# Altium PCB Test32U2.PcbDoc
Units mil, origin at the board's own origin, x right, y up, seen from the top; angles counter-clockwise.
Board outline 1500 x 2050 mil, 2 copper layers (Top Layer, Bottom Layer); 26 components, 36 nets, 125 pads, 19 vias.
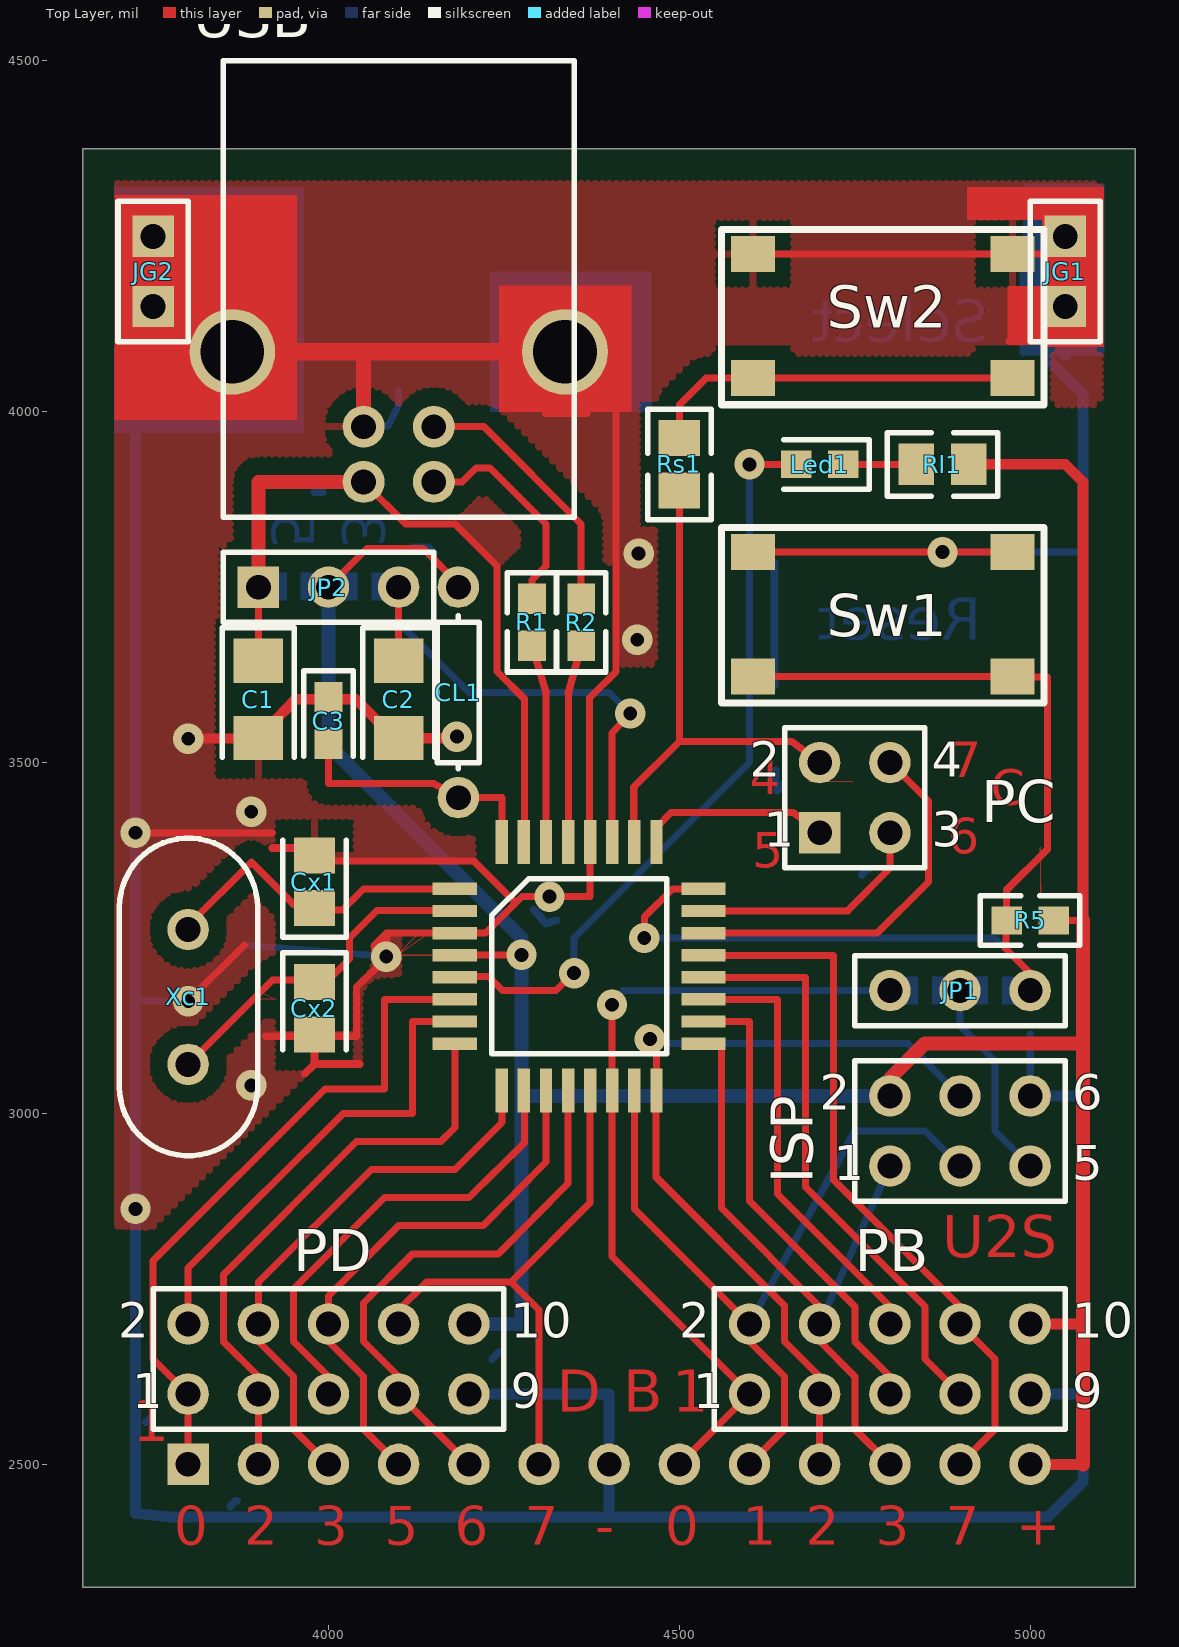
[diagram p0: Top Layer view]
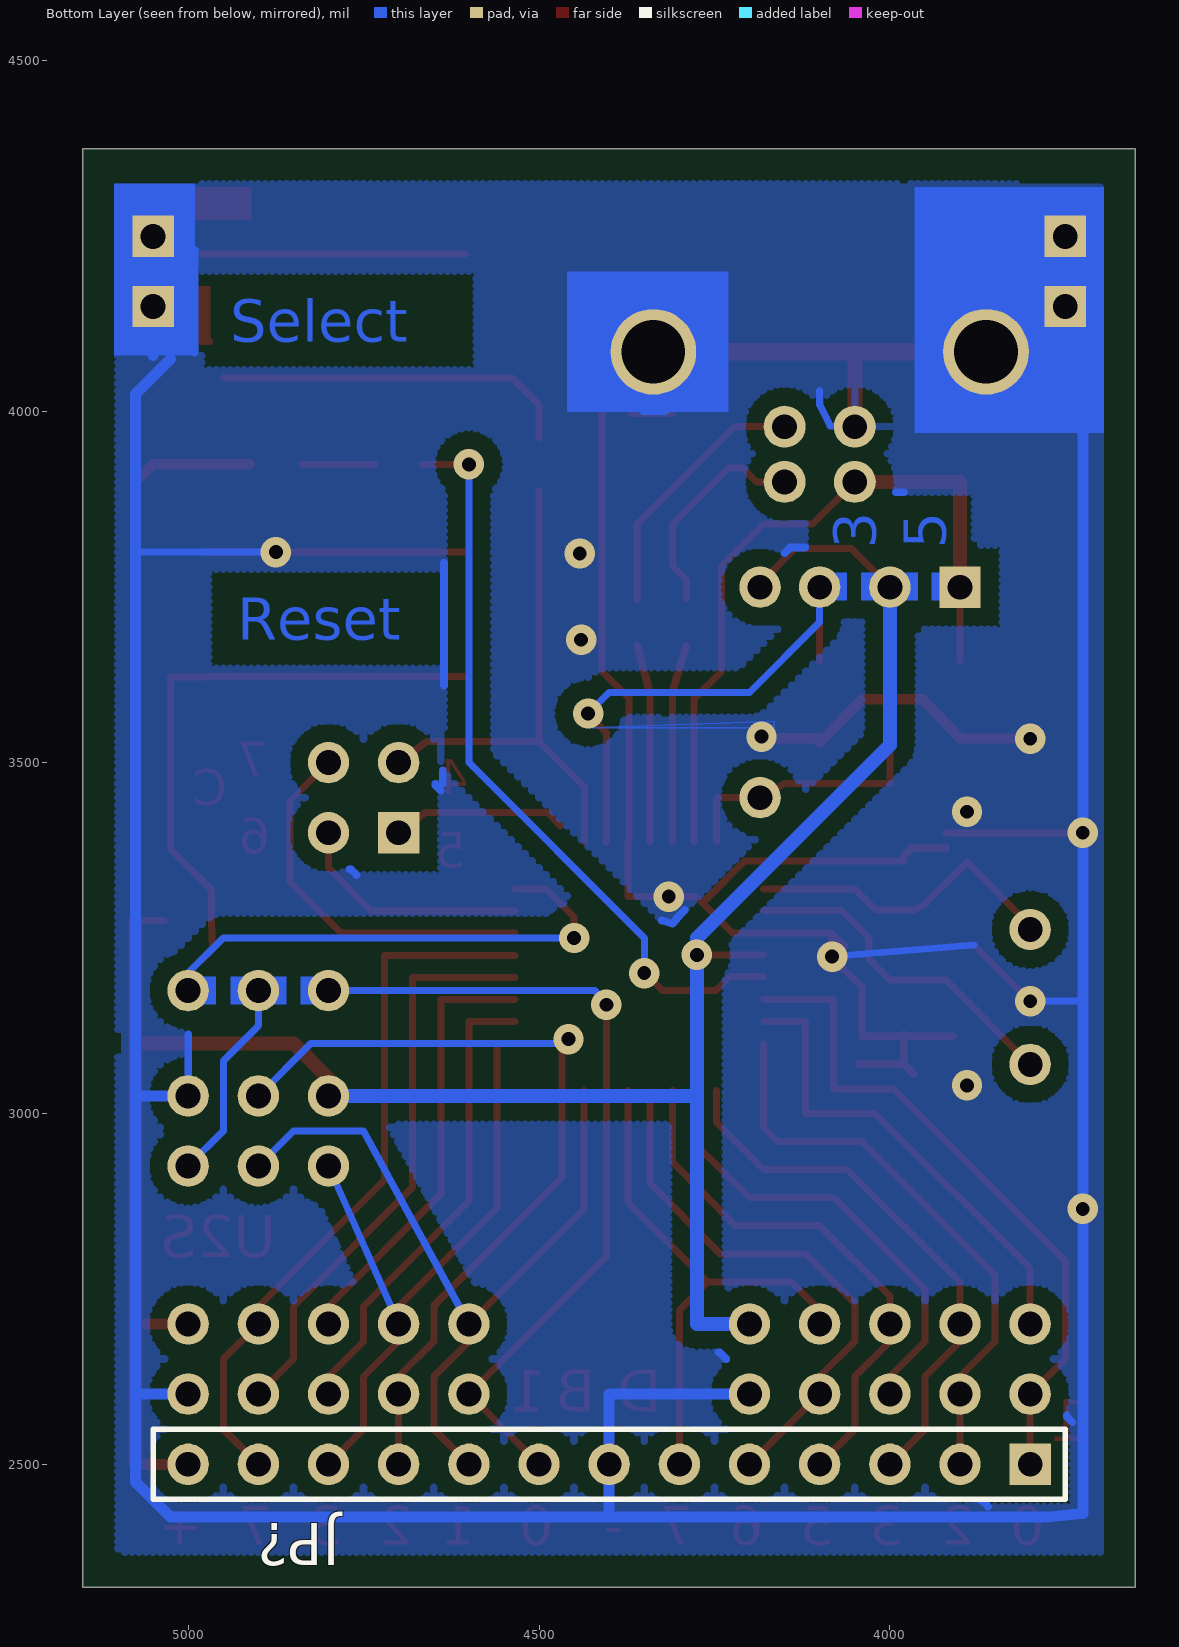
[diagram p1: Bottom Layer view, seen from below]

## Layer stack, top to bottom
Top Layer: signal copper 1.4
Dielectric: dielectric 12.6, FR-4, Dk 4.8
Bottom Layer: signal copper 1.4

## Board outline
5150,4375 5150,2895 5150,2325 3650,2325 3650,2800 3650,4375

## Design rules (kind name [scope] priority, off if disabled: settings)
Clearance [All] p1: gap=10
ComponentClearance [All] p1: gap=10 collisioncheckmode=0
PolygonConnect [All] p1: connectstyle=Relief reliefconductorwidth=10 reliefentries=4 polygonreliefangle="90 Angle"
RoutingLayers [All] p1: top layer=Horizontal bottom layer=Vertical
RoutingVias [All] p1: holewidth=28 width=50 viastyle="Through Hole" minholewidth=28 minwidth=50 maxholewidth=28 maxwidth=50
SolderMaskExpansion [All] p1: expansion=4
TestPointUsage [All] p1: valid=0 allowmultiple=FALSE
Testpoint [All] p1: side=15 testpointundercomponent=TRUE minsize=40 maxsize=100 preferedsize=60 minholesize=0 maxholesize=40 preferedholesize=32 testpointgrid=1 style=1023 order=1234567890
Width [All] p1: maxlimit=100 minlimit=10 preferedwidth=10 toplayer_prefwidth=11 bottomlayer_prefwidth=11 minimp=50.000000 maximp=50.000000 favimp=50.000000
16 further rules are at their usual default settings.

## Classes and differential pairs
component class Test162: PB U1

## Components (designator, comment, footprint, x,y, rotation, side; value= is the part's Value field where it differs from the comment)
C1 "" CC3216-1206 3900,3590 r270 top
C2 "" CC3216-1206 4100,3590 r270 top
C3 "" CC1608-0603 4000,3560 r270 top
CL1 "Res1" AXIAL-0.3 4185,3600 r90 top
Cx1 "Cap Pol3" CC2012-0805 3980,3330 r90 top
Cx2 "Cap Pol3" CC2012-0805 3980,3150 r270 top
ISP "Header 3X2" HDR2X3 4800,2925 r0 top
JG1 "Header 2" HDR1X2 5050,4250 r270 top
JG2 "Header 2" HDR1X2 3750,4250 r270 top
JP1 "Header 3" HDR1X3#1 4800,3175 r0 top
JP2 "Header 3" HDR1X3#2 3900,3750 r0 top
JP? "Header 13" HDR1X13 3800,2500 r0 bottom
Led1 "" CC1608-0603 4700,3925 r180 top
PB "Header 5X2" HDR2X5 4600,2600 r0 top
PC "Header 2X2" HDR2X2 4700,3400 r0 top
PD "Header 5X2" HDR2X5 3800,2600 r0 top
R1 "Res3" C1608-0603 4290,3700 r270 top
R2 "Res3" C1608-0603 4360,3700 r270 top
R5 "" C1608-0603 5000,3275 r0 top
Rl1 "Res Semi" CR2012-0805 4875,3925 r0 top
Rs1 "Res Semi" CR2012-0805 4500,3925 r90 top
Sw1 "Component_1" MTS-1132 4975,3800 r180 top
Sw2 "Component_1" MTS-1132 4975,4225 r180 top
USB "Component_1" USBB 4050,3900 r0 top
Xc1 "Component_1" HC49 3800,3070 r90 top
? "Mega32U2" ATMega32U2 4180,3320 r0 top

## Footprints (in the part's own frame and the unit in brackets; to place one, negate y for a bottom-side part, rotate by r counter-clockwise, add the part's x,y. Pads: shape width x height; smd on the part's side, far side on the other; paste and mask are expansions set on the pad)
ATMega32U2 [mm]
  rect 1.6x0.45 smd: 1(0,0) 2(0,-0.8) 3(0,-1.6) 4(0,-2.4) 5(0,-3.2) 6(0,-4) 7(0,-4.8) 8(0,-5.6) 17(9,-5.6) 18(9,-4.8) 19(9,-4) 20(9,-3.2) 21(9,-2.4) 22(9,-1.6) 23(9,-0.8) 24(9,0)
  rect 0.45x1.6 smd: 9(1.7,-7.3) 10(2.5,-7.3) 11(3.3,-7.3) 12(4.1,-7.3) 13(4.9,-7.3) 14(5.7,-7.3) 15(6.5,-7.3) 16(7.3,-7.3) 25(7.3,1.7) 26(6.5,1.7) 27(5.7,1.7) 28(4.9,1.7) 29(4.1,1.7) 30(3.3,1.7) 31(2.5,1.7) 32(1.7,1.7)
  silkscreen extent 1.34,-5.96 7.67,0.36
AXIAL-0.3 [mm]
  round 1.5 hole 0.9: 1(-3.81,0) 2(3.81,0)
  silkscreen extent -2.77,-0.76 2.77,0.76
C1608-0603 [mm]
  rect 1.1x1 smd: 1(-0.85,0) 2(0.85,0)
  silkscreen extent -1.8,-0.9 1.8,0.9
CC1608-0603 [mm]
  rect 1.1x1 smd: 1(-0.85,0) 2(0.85,0)
  silkscreen extent -1.8,-0.9 1.3,0.9
CC2012-0805 [mm]
  rect 1.3x1.5 smd: 1(-0.95,0) 2(0.95,0)
  silkscreen extent -2,-1.15 1.5,1.15
CC3216-1206 [mm]
  rect 1.6x1.8 smd: 1(-1.4,0) 2(1.4,0)
  silkscreen extent -2.6,-1.3 2.1,1.3
CR2012-0805 [mm]
  rect 1.3x1.5 smd: 1(-0.95,0) 2(0.95,0)
  silkscreen extent -2,-1.15 2,1.15
HC49 [mm]
  round 1.5 hole 0.9: 1(0,0) 2(4.88,0)
  silkscreen extent -3.31,-2.51 8.19,2.49
HDR1X2 [mm] "Connector; Header; 2 Position"
  rect 1.5x1.5 hole 0.9: 1(0,0) 2(2.54,0)
  silkscreen extent -1.27,-1.27 3.81,1.27
HDR1X3#1 [mm] "Connector; Header; 3 Position"
  round 1.5 hole 0.9: 1(0,0) 2(2.54,0) 3(5.08,0)
  silkscreen extent -1.27,-1.27 6.35,1.27
HDR1X3#2 [mm] "Connector; Header; 3 Position"
  rect 1.5x1.5 hole 0.9: 1(0,0)
  round 1.5 hole 0.9: 2(2.54,0) 3(5.08,0)
  silkscreen extent -1.27,-1.27 6.35,1.27
HDR1X13 [mm] "Connector; Header; 13 Position"
  rect 1.5x1.5 hole 0.9: 1(0,0)
  round 1.5 hole 0.9: 2(2.54,0) 3(5.08,0) 4(7.62,0) 5(10.16,0) 6(12.7,0) 7(15.24,0) 8(17.78,0) 9(20.32,0) 10(22.86,0) 11(25.4,0) 12(27.94,0) 13(30.48,0)
  silkscreen extent -1.27,-1.27 31.75,1.27
HDR2X2 [mm] "Connector; Header; 2x2 Position"
  rect 1.5x1.5 hole 0.9: 1(0,0)
  round 1.5 hole 0.9: 2(0,2.54) 3(2.54,0) 4(2.54,2.54)
  silkscreen extent -1.27,-1.27 3.81,3.81
HDR2X3 [mm] "Connector; Header; 3x2 Position"
  round 1.5 hole 0.9: 1(0,0) 2(0,2.54) 3(2.54,0) 4(2.54,2.54) 5(5.08,0) 6(5.08,2.54)
  silkscreen extent -1.27,-1.27 6.35,3.81
HDR2X5 [mm] "Connector; Header; 5x2 Position"
  round 1.5 hole 0.9: 1(0,0) 2(0,2.54) 3(2.54,0) 4(2.54,2.54) 5(5.08,0) 6(5.08,2.54) 7(7.62,0) 8(7.62,2.54) 9(10.16,0) 10(10.16,2.54)
  silkscreen extent -1.27,-1.27 11.43,3.81
MTS-1132 [mm]
  rect 1.6x1.3 smd: 1(0,0) 1(9.4,0) 2(0,4.5) 2(9.4,4.5)
  silkscreen extent -1.14,-0.89 10.54,5.46
USBB [mm]
  round 1.52 hole 0.9: 1(0,0) 2(2.54,0) 3(2.54,2) 4(0,2)
  round 3.1 hole 2.3: 5(-4.75,4.71) 5(7.29,4.71)
  silkscreen extent -5.08,-1.27 7.62,15.24

## Part data
C1 C2 C3 Cx1 Cx2: library part "Cap Semi", "Capacitor (Semiconductor SIM Model)"
CL1 R1 R2: "Resistor"
ISP: "Header, 3-Pin, Dual row"
JG1 JG2: "Header, 2-Pin"
JP1 JP2: "Header, 3-Pin"
JP?: library part "Header 12", "Header, 12-Pin"
Led1: library part LED3, "Typical BLUE SiC LED"
PB PD: "Header, 5-Pin, Dual row"
PC: library part "Header 5X2", "Header, 5-Pin, Dual row"
R5: library part Res3, "Resistor"
Rl1 Rs1: "Semiconductor Resistor"
?: library part Component_1

## Via types
v1: diameter 43.31, hole 19.68, Top Layer to Bottom Layer, tented both sides, 19 vias

## Nets (pads, with @x,y where several pads share a name; then routed paths per layer and width w, separated by ;. In a path a pad name is that pad's centre, name@x,y a point inside that pad or via, vN(x,y) a via of type N, cw(c..) or ccw(c..) an arc to the next point about the centre after c; other vN are vias at no path point)
AVCC: ?.32 C3.2 CL1.1 | length 371.3
  Top Layer w10: C3.2 4000,3470 4150,3470 4190,3450 4247,3450 ?.32
D+: ?.29 R2.2 | length 282
  Top Layer w10: ?.29@4342,3386.93 4342,3600
  Top Layer w11: 4342,3600 R2.2
D-: ?.30 R1.2 | length 282.5
  Top Layer w10: ?.30@4310,3386.93 4310,3600
  Top Layer w11: R1.2 4310,3600
GND: ?.3 ?.28 C1.2 C2.2 C3.1 Cx1.2 Cx2.2 ISP.6 JG1.1 JG1.2 JG2.1 JG2.2 JP?.7 PB.9 PD.9 Sw1.1 Sw2.1 USB.4 USB.5 | length 10874.3
  Top Layer w10: v1(3725,3400) 3770,3400 3920,3400 ; v1(3800,3160) 3880,3240 ; 3910,3110 4040,3110 4040,3180 4070,3209 v1(4082.3,3223.5) 4083,3257 ; Cx1.2@3980,3360 4207,3360 4266,3301 ; v1@4065.5,3235.3 4065,3239 4083,3257 ; v1@4180.88,3534.88 v1(4183,3537) ; ?.28@4372,3386.93 4372,3592 4410,3630 4410,4010 ; 4372.91,3309 ?.28 ; 4373,3309 4276,3309 4224,3257 ?.3 4129,3257 4083,3257 ; Sw1.1@4604.92,3800 Sw1.1@4975,3800 ; Sw2.1@4604.92,4225 5054,4225 JG1.1 ; 4969.97,4099.99 5025.97,4099.99
  Top Layer w11: 3919.97,3378.23 3969.17,3378.23 Cx1.2 ; 3966.3,3056.51 3980.3,3070.5 ; Cx2.2 3980,3070.8 3980.3,3070.5 ; 4044.5,3070.5 3980.3,3070.5 ; 4310,3997.99 4367.82,3997.99
  Top Layer w15: v1(3800,3534) C1.2 3953,3590 4039,3590 4096.73,3531.65 C2.2@4100,3528.35 ; C2.2 v1@4180.88,3534.88
  Top Layer w21.38: USB.4 4050,4084.43
  Top Layer w25: USB.5@3862.99,4085.43 USB.5@4337.01,4085.43
  Bottom Layer w10: 3730,3160 v1(3800,3160) ; 3880,3240 v1(4082.3,3223.5) ; USB.4 4085,3980 4100,4010 4100,4030 ; v1(4875,3800) 5075,3800
  Bottom Layer w11: 3739.97,2560.03 3747.98,2568.03 3748.01,2570 ; 3860.03,2439.97 3868.06,2448.01 3870,2448.01 ; 3979.5,3885.49 3991.35,3885.49 ; 4120.48,3806.43 4142.34,3806.43 4150,3798.77 ; 4233.22,2650 4242.72,2659.5 4244.31,2659.5 ; 4303.6,3278.68 4292.4,3289.87 4310,3270.38 4324.9,3275.1 ; 4321,4001 4351,4001 ; 4635.5,3610 4635.5,3785 ; 4637,3470 4637,3489 ; 4639.97,3460 4648.01,3468.03 4648.01,3470 ; 4760,3339.97 4768.03,3348.01 4770,3348.01 ; 4989.97,4230 4990.5,4229.47 4990.5,4084.5 ; ISP.6 5000,3113
  Bottom Layer w15.75: 3750,4050 JG2.2 JG2.1 ; 3775,4075 3725,4025 3725,2475 3725,2430 3775,2425 5025,2425 5075,2475 5075,4025 5025,4075 ; PD.9 4400,2600 4400,2425 ; PB.9 5075,2600 ; ISP.6 5075,3025 ; 5050,4080 JG1.2 JG1.1
  other v1: 3725,2864 3890,3040 4315,3309 3890,3430 4440,3675 4442,3798
NetLed1_1: Led1.1 Rl1.1 | length 104.1
  Top Layer w10: Led1.1 Rl1.1
NetRs1_2: Rs1.2 Sw2.2 | length 513.3
  Top Layer w10: Rs1.2 4500,4010 4537.84,4047.84 Sw2.2@4950,4047.84
PB0: ?.14 JP1.1 JP?.8 PB.1 | length 1183.2
  Top Layer w10: v1(4404,3155) 4404,2796 PB.1 JP?.8
  Bottom Layer w10: v1(4404,3155) 4420,3175 JP1.1
PB1: ?.15 ISP.3 JP?.9 PB.2 | length 1125.9
  Top Layer w10: ?.15@4436,3032.6 4436,2864 PB.2 4600,2675 4650,2625 4650,2550 JP?.9
  Bottom Layer w10: PB.2 4750,2975 4850,2975 ISP.3
PB2: ?.16 ISP.4 JP?.10 PB.3 | length 1154.5
  Top Layer w10: v1(4458,3106) 4467.4,3096.6 4467,2909 4650,2726 ; 4650,2725 4650,2675 PB.3@4700,2625 ; JP?.10 PB.3
  Bottom Layer w10: v1(4458,3106) 4475,3100 4825,3100 ISP.4
PB3: ?.17 ISP.1 JP?.11 PB.4 | length 945.2
  Top Layer w10: ?.17@4560,3100 4560,2865 4700,2725 PB.4 4701,2674 4750,2625 4750,2550 JP?.11
  Bottom Layer w10: PB.4 ISP.1
PB4: ?.18 PB.5 | length 679.5
  Top Layer w10: ?.18 4600,3131 4600,2875 4750,2725 4750,2675 4800,2625 PB.5
PB5: ?.19 PB.6 | length 634.5
  Top Layer w10: ?.19 4640,3162.52 4640,2885 4800,2725 PB.6
PB6: ?.20 PB.7 | length 830.8
  Top Layer w10: ?.20 4680,3194.02 4680,2895 4850,2725 4850,2650 PB.7
PB7: ?.21 JP?.12 PB.8 | length 1026.6
  Top Layer w10: ?.21@4534.33,3225 4720,3225 4720,2905 4900,2725 PB.8 4950,2650 4950,2550 JP?.12
PC1: ?.24 JP1.3 R5.1 Sw1.2 | length 1657.5
  Top Layer w10: v1(4450,3250) 4450,3280 4490,3320 ?.24 ; Sw1.2@4604.92,3622.83 Sw1.2@4975,3622.84 ; Sw1.2@4975,3622 5025,3622 5025,3377 4966.53,3318.86 R5.1 4965,3235 5000,3200 JP1.3
  Bottom Layer w10: v1(4450,3250) 4950,3250 5000,3200 JP1.3 JP1.3@5000,3150
PC2: ?.5 Led1.2 | length 1083.1
  Top Layer w10: ?.5@4180.35,3195 4228,3195 4248,3175 4324,3175 v1(4350,3200) ; v1(4600,3925) Led1.2
  Bottom Layer w10: v1(4350,3200) 4350,3250 4600,3500 v1(4600,3925)
PC4: ?.26 PC.2 Rs1.1 | length 737.6
  Top Layer w10: ?.26@4435,3386.93 4435,3465 4500,3530 ; Rs1.1 4500,3530 ; PC.2 4660,3530 4500,3530
PC5: ?.25 PC.1 | length 248
  Top Layer w10: ?.25@4470,3410 4488,3429 4662,3429 PC.1
PC6: ?.23 PC.3 | length 341.2
  Top Layer w10: ?.23 4740,3288.5 ; 4740,3289 4800,3350 PC.3
PC7: ?.22 PC.4 | length 543.7
  Top Layer w10: ?.22 4782,3257.01 4855,3330 4855,3445 PC.4
PD0: ?.6 JP?.1 PD.1 | length 969.7
  Top Layer w10: JP?.1 PD.1 3750,2650 3750,2790 3995,3035 4080,3035 4080,3162.52 ?.6
PD1: ?.7 PD.2 | length 681.8
  Top Layer w10: PD.2 3800,2780 4021,3000 4120,3000 4120,3131 ?.7
PD2: ?.8 JP?.2 PD.3 | length 827.2
  Top Layer w10: JP?.2 3900,2625 3850,2675 3850,2770 4040,2960 4160,2960 4180,2980 ?.8
PD3: ?.9 JP?.3 PD.4 | length 787.8
  Top Layer w10: JP?.3 3950,2550 3950,2625 3900,2675 PD.4 3900,2760 4061,2920 4180,2920 4247,2987 ?.9
PD4: ?.10 PD.5 | length 660.2
  Top Layer w10: PD.5 4000,2625 3950,2675 3950,2750 4080,2880 4200,2880 4279,2958 ?.10@4279,3032.6
PD5: ?.11 JP?.4 PD.6 | length 772.4
  Top Layer w10: JP?.4 4050,2550 4050,2625 4000,2675 PD.6 4000,2740 4100,2840 4220,2840 4310,2931 ?.11@4310,3032.6
PD6: ?.12 JP?.5 PD.7 | length 782.7
  Top Layer w10: JP?.5 PD.7 4100,2625 4050,2675 4050,2730 4120,2800 4240,2800 ; 4242,2800 4341.5,2900 ?.12@4341.5,3030.5
PD7: ?.13 JP?.6 PD.8 | length 792.5
  Top Layer w10: PD.8 4100,2720 4140,2760 4260,2760 ; JP?.6 4300,2720 4260,2760 ; ?.13@4373,3032.6 4373,2873 4260,2760
PRST: ISP.5 JP1.2 | length 291.4
  Bottom Layer w10: JP1.2 4900,3125 4950,3075 4950,2975 ISP.5
U+: R2.1 USB.3 | length 374
  Top Layer w10: USB.3 4221.26,3978.74 4360,3840 R2.1
U-: R1.1 USB.2 | length 316.2
  Top Layer w10: USB.2 4190,3900 4210,3920 4230,3920 4310,3840 4310,3780 4290,3760 R1.1
UCAP: ?.27 C2.1 JP2.3 | length 732.9
  Top Layer w10: C2.1 JP2.3 ; ?.27@4404,3386 4404,3542 v1(4430,3570)
  Bottom Layer w10: JP2.3 4100,3700 4200,3600 4400,3600 v1(4430,3570)
UVCC: ?.31 C1.1 JP2.1 USB.1 | length 1053.8
  Top Layer w10: C1.1 JP2.1 ; USB.1 4110,3840 4180,3840 4240,3780 4240,3630 4279,3591 ?.31@4279,3386.93
  Top Layer w19.68: JP2.1 3900,3900 USB.1
VCC: ?.4 CL1.2 ISP.2 JP2.2 JP?.13 PB.10 PD.10 R5.2 Rl1.2 | length 4178.3
  Top Layer w10: JP2.2 4055,3805 4135,3805 CL1.2@4189,3751 ; ?.4@4180,3226 v1(4275,3226) ; R5.2 5075,3275
  Top Layer w15: Rl1.2 5050,3925 5075,3900
  Top Layer w15.75: ISP.2 ISP.2@4800,3050 ; JP?.13 5075,2500 ; PB.10 5075,2700 ; 5075,3275 5075,3900
  Top Layer w20: ISP.2@4800,3050 4850,3100 5075,3100 ; 5075,2500 5075,3275
  Bottom Layer w20: JP2.2 4000,3700 4000,3525 4275,3250 v1(4275,3226) 4275,2700 PD.10 ; 4275,3025 ISP.2
XT1: ?.1 Cx1.1 Xc1.2 | length 457.4
  Top Layer w10: Xc1.2@3800,3268 3890,3358 3949,3299 ; 3948,3299 3965,3290 4020,3290 4050,3320 ?.1
XT2: ?.2 Cx2.1 Xc1.1 | length 488.3
  Top Layer w10: Xc1.1 3920,3190 4000,3190 4030,3220 4030,3250 4069,3289 ?.2@4180,3289

## Polygon pours and split planes (outlines as drawn)
GND on Top Layer (hatched 90Degree grid 10 track 11, remove dead copper): 5100,4325 3700,4325 3700,2840 4000,2825 4100,3025 4100,3340 4020,3345 4020,3360 4207,3360 4200,3450 3946,3607 3900,3875 4200,3950 4410.19,3640 4500,3640 4508,4041 5003.06,4070.97 5004,4010 5100,4010 5100,4100
UVCC on Top Layer (hatched 45Degree grid 8 track 10): 4180,3840 4220,3880 4270,3830 4270,3810 4240,3780
no net on Top Layer (none): 3925,3162.52 3900,3162.52 3900,3175
no net on Top Layer (none): 4180,3225.51 4075,3225.51 4075,3225
no net on Top Layer (none): 4746.93,3472.6 4685,3472.6 4685,3474
no net on Top Layer (none): 5014.33,3379.53 5014.33,3312 5016,3312
no net on Top Layer (none): 4096,3224 4130,3258 4145,3258
GND on Bottom Layer (hatched 90Degree grid 10 track 11, remove dead copper): 3700,4325 5100,4325 5100,2375 3700,2375
GND on Bottom Layer (none): 4165,3550 4425,3550 4165,3559
no net on Bottom Layer (none): 4425,3550 4165,3550 4165,3559
no net on Top Solder (hatched 90Degree grid 10 track 11): 4234,2997 4481,2997 4481,3069 4234,3069
no net on Top Solder (hatched 90Degree grid 10 track 11): 4234,3423 4480,3423 4480,3351 4234,3351
no net on Top Solder (hatched 90Degree grid 10 track 11): 4144,3087 4144,3333 4216,3333 4216,3087
no net on Top Solder (hatched 90Degree grid 10 track 11): 4499,3087 4499,3334 4570,3334 4570,3087
no net on Bottom Solder (hatched 90Degree grid 10 track 11): 4921,3195 4980,3195 4980,3154 4923,3154 4923,3158
no net on Bottom Solder (hatched 90Degree grid 10 track 11): 4822,3195 4877,3195 4877,3154 4820,3154 4820,3155
no net on Bottom Solder (hatched 90Degree grid 10 track 11): 4021,3771 4080,3771 4080,3731 4023,3731
no net on Bottom Solder (hatched 90Degree grid 10 track 11): 3928,3771 3979,3771 3979,3731 3930,3731

## Other copper
Top Layer:
  rectangle net GND: 4968,4096 5050,4179
  rectangle net GND: 5017,4092 5105,4273
  rectangle net GND: 4910,4273 5105,4320
  rectangle net GND: 4243,4000 4432,4180
  rectangle net GND: 3695,3988 3955,4309
  text "7" at 4886,3479 h51.18
  text "4" at 4600,3455 h50
  text "C" at 4944,3439 h51.18
  text "6" at 4883,3370 h51.18
  text "5" at 4604,3350 h51.18
  text "U2S" at 4875,2795 h60
  text "D" at 4325,2575 h60
  text "B" at 4420,2575 h60
  text "1" at 4490,2575 h60
  text "1" at 3721,2533 h60
  text "0" at 3780,2385 h55.12
  text "2" at 3880,2385 h55.12
  text "3" at 3980,2385 h55.12
  text "5" at 4080,2385 h55.12
  text "6" at 4180,2385 h55.12
  text "7" at 4280,2385 h55.12
  text "-" at 4380,2385 h55.12
  text "0" at 4480,2385 h55.12
  text "1" at 4590,2385 h55.12
  text "2" at 4680,2385 h55.12
  text "3" at 4780,2385 h55.12
  text "7" at 4880,2385 h55.12
  text "+" at 4980,2385 h55.12
Bottom Layer:
  rectangle net GND: 3695,3970 3965,4320
  rectangle net GND: 4990,4080 5106,4325
  rectangle net GND: 4230,4000 4460,4200
  rectangle net VCC: 4001,3731 4041,3771
  rectangle net VCC: 3960,3731 4000,3771
  rectangle net UVCC: 3901,3731 3941,3771
  region net PC1: 5000,3195 4960,3195 4960,3155 5000,3155
  region net PRST: 4940,3195 4900,3195 4900,3155 4940,3155
  region net PRST: 4900,3195 4860,3195 4860,3155 4900,3155
  region net PB0: 4840,3195 4800,3195 4800,3155 4840,3155
  rectangle net UCAP: 4061,3731 4101,3771
  text "Select" at 4940,4100 h60
  text "5" at 3920,3805 h60 r270
  text "3" at 4020,3805 h60 r270
  text "Reset" at 4930,3675 h60

## Silkscreen, mask and mechanical layers (free items; w line width, h text height)
Mechanical 1:
  lines w10: 3650,2325 5150,2325 5150,4375 3650,4375 3650,2325

## Text inside footprints (layer, text, board x,y; h text height)
ISP: Top Overlay "1" at 4720,2905 h50; Top Overlay "2" at 4700,3005 h50; Top Overlay "5" at 5060,2905 h50; Top Overlay "6" at 5060,3005 h50
PB: Top Overlay "2" at 4500,2680 h50; Top Overlay "1" at 4520,2580 h50; Top Overlay "9" at 5060,2580 h50; Top Overlay "10" at 5060,2680 h50
PC: Top Overlay "3" at 4860,3380 h50; Top Overlay "4" at 4860,3480 h50; Top Overlay "2" at 4600,3480 h50; Top Overlay "1" at 4620,3380 h50
PD: Top Overlay "2" at 3700,2680 h50; Top Overlay "1" at 3720,2580 h50; Top Overlay "9" at 4260,2580 h50; Top Overlay "10" at 4260,2680 h50